# EAGLE board AD8620 (EAGLE 6.6.0)
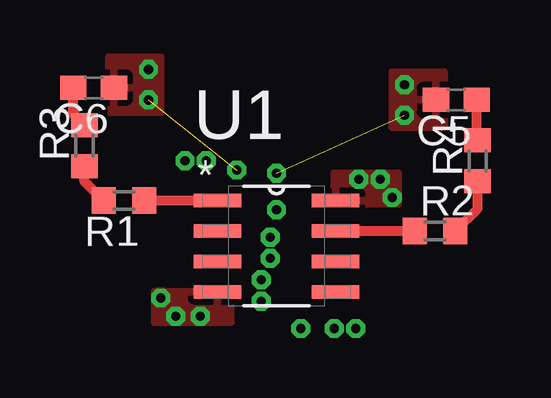
[diagram p0: board, top side]
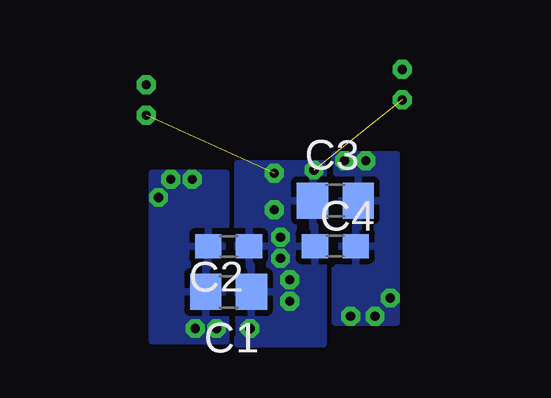
[diagram p1: board, bottom side, seen from below]

No outline drawn. Coordinates in mm, seen from the top.
Copper layers (1*2*3*14*15*16): Top 0.035mm / dielectric 1.5mm / Route2 0.035mm / dielectric 0.15mm / Route3 0.035mm / dielectric 0.2mm / Route14 0.035mm / dielectric 0.15mm / Route15 0.035mm / dielectric 0.2mm / Bottom 0.035mm
Design rules "default *": minimum track width 10mil, minimum drill 24mil, track to track 8mil, track to pad 8mil, pad to pad 8mil, via to via 8mil, smd to smd 8mil, copper to edge 40mil, drill to drill 8mil, minimum pad ring 10mil, minimum via ring 8mil, stop-mask expansion 4mil, vias tented up to drill 0mil, thermal gap 10mil

## Footprints (pad centres in the part's own frame; a part is rotated, then mirrored left to right if it is on the bottom)
C0805 = smd 1.3 x 1.5: 1 -0.95,0; 2 0.95,0
C0603 = smd 1.1 x 1: 1 -0.85,0; 2 0.85,0
R0603 = smd 1 x 1.1: 1 -0.85,0; 2 0.85,0
SOIC127P600X175-8N = smd 1.981 x 0.559: 1 -2.464,1.905; 2 -2.464,0.635; 3 -2.464,-0.635; 4 -2.464,-1.905; 5 2.464,-1.905; 6 2.464,-0.635; 7 2.464,0.635; 8 2.464,1.905

## Placement (x,y rotation side)
C1  10uF  [C0805]  1.91,-1.91 180 bottom
C2  0.1uF  [C0603]  1.91,0 180 bottom
C3  10uF  [C0805]  -2.54,1.91 0 bottom
C4  0.1uF  [C0603]  -2.54,0 0 bottom
C5  10nF  [C0603]  7.49,6.1 180 top
C6  10nF  [C0603]  -7.62,6.6 180 top
R1  0Ω  [R0603]  -6.35,1.91 180 top
R2  0Ω  [R0603]  6.6,0.64 0 top
R3  50Ω  [R0603]  -8,4.19 90 top
R4  50Ω  [R0603]  8.38,3.56 90 top
U1  AD8620ARZ  [SOIC127P600X175-8N]  0,0 0 top

## Library data of the parts
C1-C6 = eagle-ltspice; SPICEMODEL: NONE; SPICEPREFIX: C
R1-R4 = eagle-ltspice; SPICEMODEL: NONE; SPICEPREFIX: R
U1 = Analog Devices_By_element14_Batch_1; MPN: AD8620ARZ; OC_FARNELL: 9994386; OC_NEWARK: 59K6972; PACKAGE: SOIC-8; SUPPLIER: Analog Devices

## Nets
+PWR: C1.2 C2.2 U1.8
-PWR: C3.2 C4.2 U1.4
DACO_1: U1.3
DACO_7: U1.5
GND: C1.1 C2.1 C3.1 C4.1 C5.2 C6.1
INV_1: U1.2
INV_7: U1.6
N$1: R1.1 U1.1
N$2: R2.1 U1.7
RFB_1: R1.2 R3.1
RFB_7: R2.2 R4.1
VOUT_1: C6.2 R3.2
VOUT_7: C5.1 R4.2

## Tracks (layer width: path | path; a pad name or v marks a point on that pad's centre or on a via)
+PWR  (via drill 0.38)
  other vias: 4.32,2.79 3.3,-3.43 2.41,-3.43 4.83,2.03 3.43,2.79
  pour Bottom (isolate 0.406): 2.03,-3.94 2.03,3.05 5.08,3.05 5.08,-3.94
  pour Top (isolate 0.406): 2.41,1.78 5.08,1.78 5.08,3.05 2.41,3.05
-PWR  (via drill 0.38)
  other vias: -4.83,-2.16 -4.19,-2.92 -3.17,-2.92 -3.81,3.56 -2.92,3.56
  pour Bottom (isolate 0.406): -5.08,3.81 -2.54,3.81 -2.54,-3.17 -5.08,-3.17
  pour Top (isolate 0.406): -4.45,-1.91 -1.91,-1.91 -1.91,-3.17 -5.08,-3.17 -5.08,-1.91
GND  (via drill 0.38)  (2 unrouted)
  other vias: 0,3.05 -5.33,7.37 -1.65,3.17 1.02,-3.43 0,1.52 -0.25,0.38 -0.25,-0.51 -0.64,-1.4 -0.64,-2.29 -5.33,6.1 5.33,5.46 5.33,6.73
  pour Bottom (isolate 0.406): -2.03,3.43 -2.03,-4.06 1.52,-4.06 1.52,3.43
  pour Top (isolate 0.406): -6.99,7.87 -4.83,7.87 -4.83,5.59 -6.99,5.59
  pour Top (isolate 0.406): 6.99,4.95 4.83,4.95 4.83,7.24 6.99,7.24
N$1
  Top 0.406: U1.1 R1.1
N$2
  Top 0.406: U1.7 R2.1
RFB_1
  Top 0.406: R1.2 -8,2.71 R3.1
RFB_7
  Top 0.406: R2.2 8.38,1.56 R4.1
VOUT_1
  Top 0.406: R3.2 -8.47,5.51 C6.2
VOUT_7
  Top 0.406: R4.2 8.34,4.45 C5.1